# EAGLE board Felderblock6-a-3 (EAGLE 9.6.2)
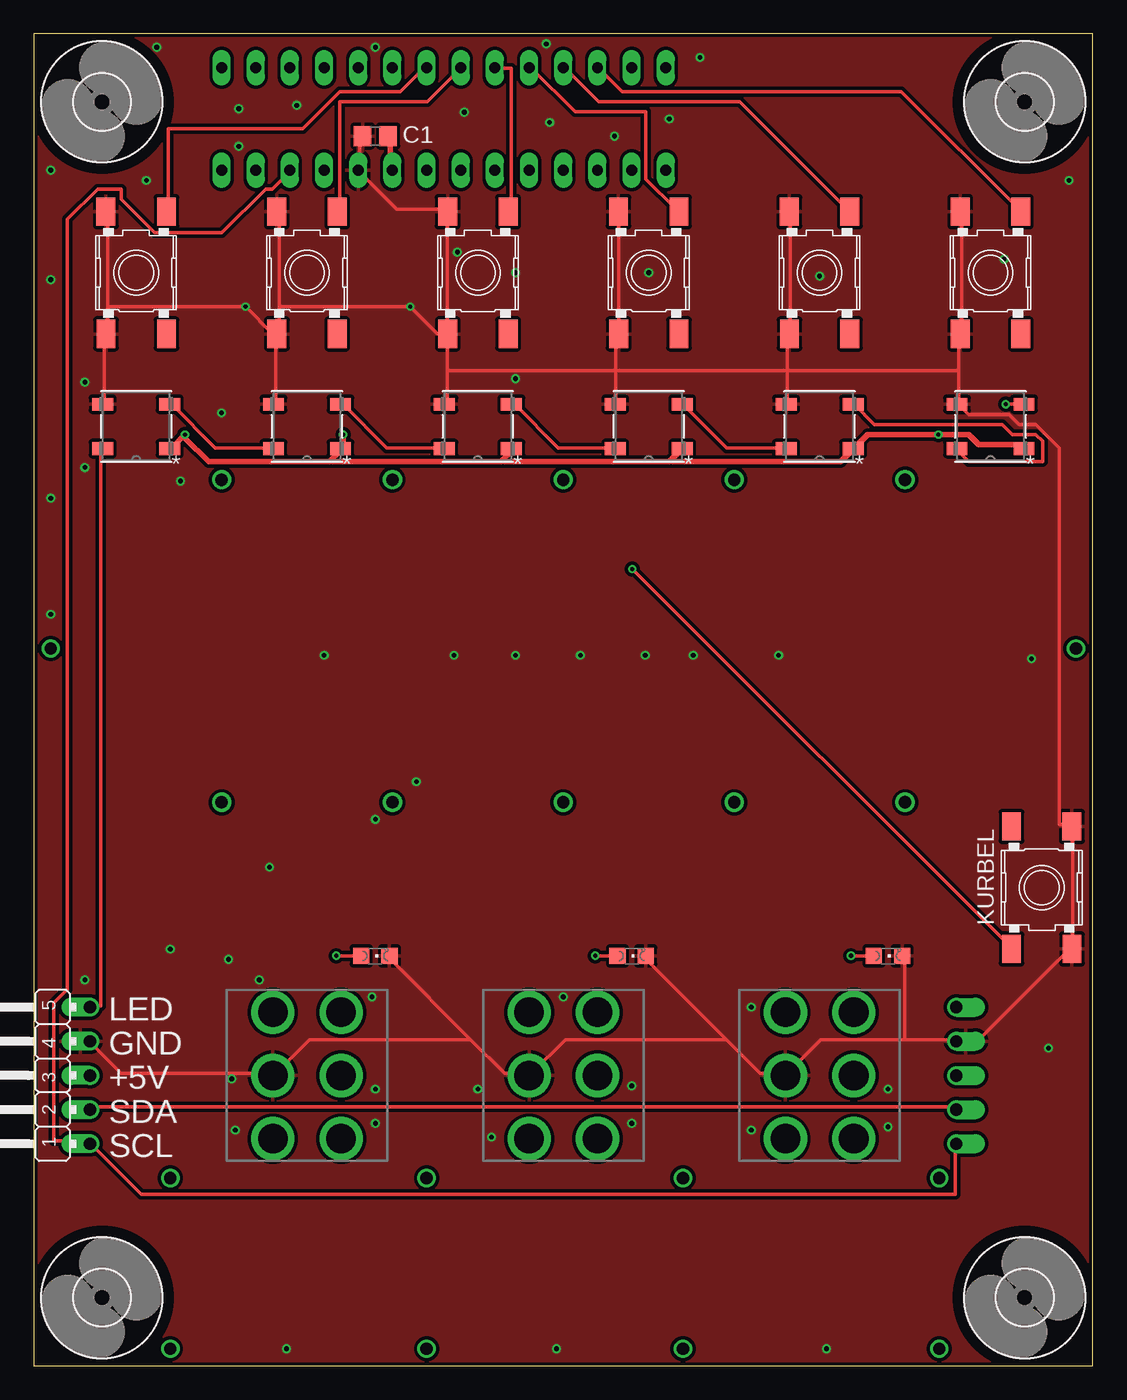
[diagram p0: board, top side]
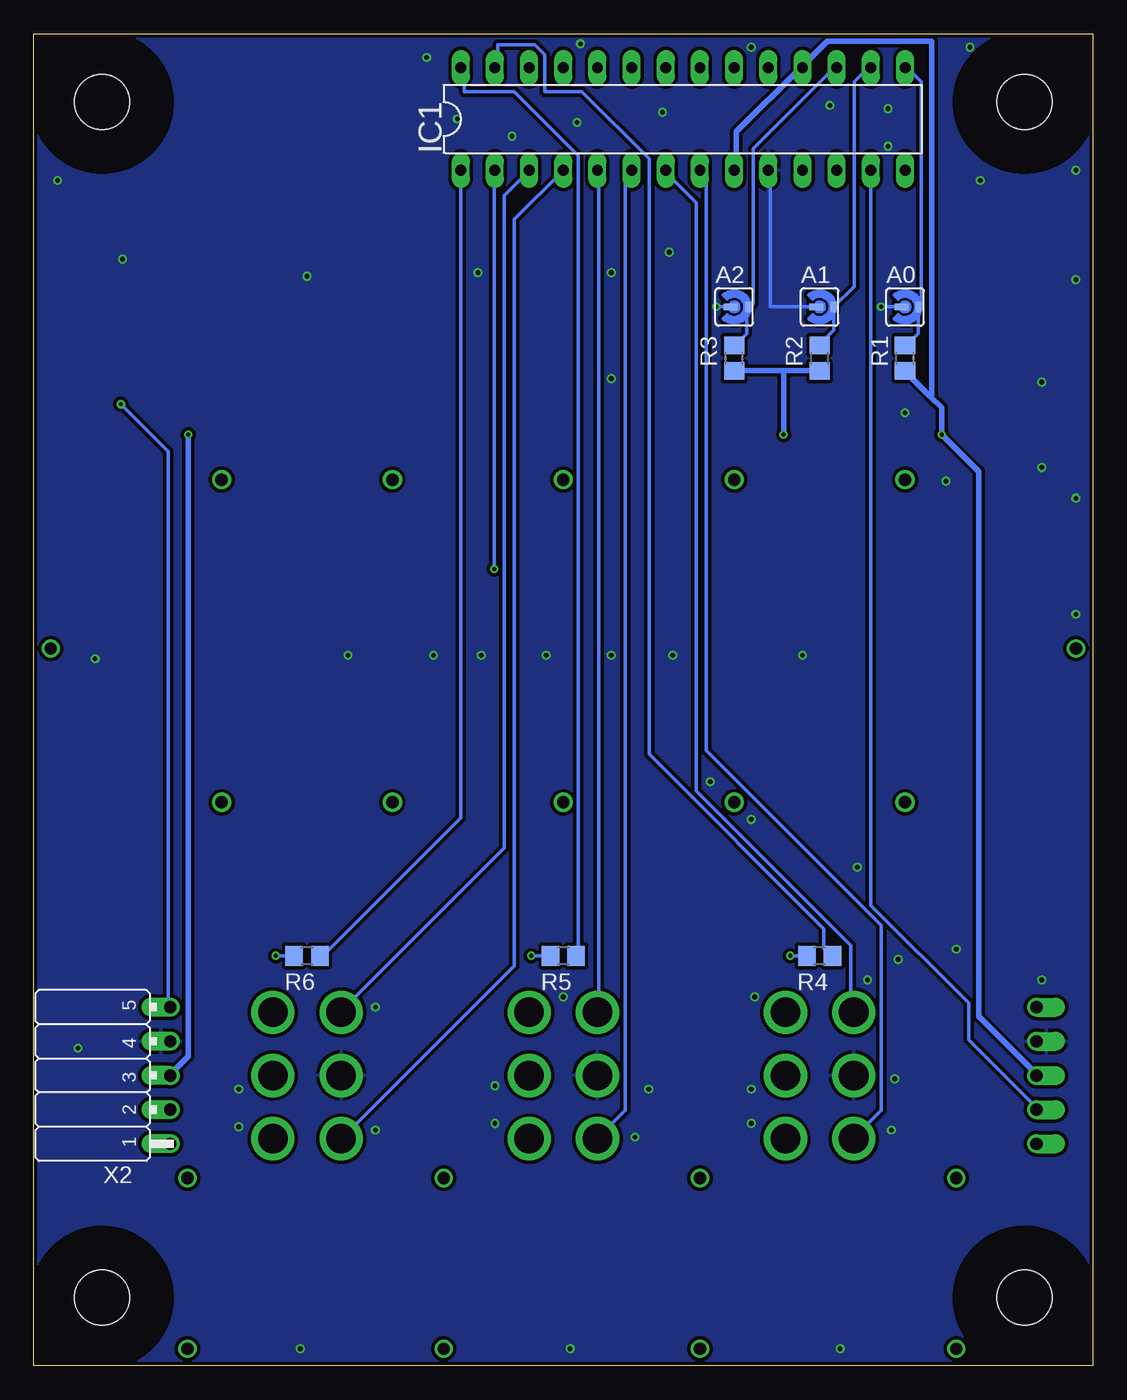
[diagram p1: board, bottom side, seen from below]

Size 78.74 x 99.06 mm. Coordinates in mm from the lower left corner, seen from the top.
Outline: 0,0 78.74,0 78.74,99.06 0,99.06 0,0
Copper layers (1*16): Top 0.035mm / dielectric 1.5mm / Bottom 0.035mm
Design rules "SeeedStudio_2layer_DRU_no_angle_20140221": minimum track width 6mil, minimum drill 12mil, track to track 6mil, track to pad 6mil, pad to pad 6mil, via to via 6mil, smd to smd 0mil, copper to edge 10mil, drill to drill 10mil, minimum pad ring 10mil, minimum via ring 6mil, stop-mask expansion 2mil, vias tented up to drill 100mil, thermal gap 10mil
Net classes: 0 default: width 0.254 mm, clearance 0.254 mm; 1 pwr: width 0.406 mm, clearance 0.254 mm

## Footprints (pad centres in the part's own frame; a part is rotated, then mirrored left to right if it is on the bottom)
SJ_RND2 = smd 1.016 x 0.508: P$1 -0.254,0 | smd 0.406 x 0.813: P$2 1.016,0
C0805 = smd 1.3 x 1.5: 1 -0.95,0; 2 0.95,0
4,1 = hole 4.1: 0,0
DIL28-3 = drill 0.813 long: 1 -16.51,-3.81; 2 -13.97,-3.81; 3 -11.43,-3.81; 4 -8.89,-3.81; 5 -6.35,-3.81; 6 -3.81,-3.81; 7 -1.27,-3.81; 8 1.27,-3.81; 9 3.81,-3.81; 10 6.35,-3.81; 11 8.89,-3.81; 12 11.43,-3.81; 13 13.97,-3.81; 14 16.51,-3.81; 15 16.51,3.81; 16 13.97,3.81; 17 11.43,3.81; 18 8.89,3.81; 19 6.35,3.81; 20 3.81,3.81; 21 1.27,3.81; 22 -1.27,3.81; 23 -3.81,3.81; 24 -6.35,3.81; 25 -8.89,3.81; 26 -11.43,3.81; 27 -13.97,3.81; 28 -16.51,3.81
FELD-BOARD-HOLDER = drill 0.914: 1 0,0; 2 0,23.978
TACTSW-6X6 = smd 2.1 x 1.4: 1 -4.55,2.24; 2 4.55,2.25; 3 -4.55,-2.25; 4 4.55,-2.25
COM-16347_SPK-M = smd 1.549 x 0.94: 1 -2.489,1.65; 2 -2.489,-1.65; 3 2.489,-1.65; 4 2.489,1.65
CHIPLED_0805 = smd 1.2 x 1.2: A 0,-1.05; C 0,1.05
R0805 = smd 1.3 x 1.5: 1 -0.95,0; 2 0.95,0
DP-T1 = drill 2.2 pad 3.2: 1 -4.699,2.54; 2 0,2.54; 3 4.699,2.54; 4 -4.699,-2.54; 5 0,-2.54; 6 4.699,-2.54
JP5F = drill 0.914 offset: 1 -5.08,0; 2 -2.54,0; 3 0,0; 4 2.54,0; 5 5.08,0
JP5F-FEM = drill 0.914 offset: 1 -5.08,0; 2 -2.54,0; 3 0,0; 4 2.54,0; 5 5.08,0

## Placement (x,y rotation side)
A0  [SJ_RND2]  13.97,78.74 0 bottom
A1  [SJ_RND2]  20.32,78.74 0 bottom
A2  [SJ_RND2]  26.67,78.74 0 bottom
C1  [C0805]  25.4,91.44 180 top
H1  MOUNT-HOLE4.1  [4,1]  73.66,5.08 0 top
H2  MOUNT-HOLE4.1  [4,1]  5.08,5.08 0 top
H3  MOUNT-HOLE4.1  [4,1]  73.66,93.98 0 top
H4  MOUNT-HOLE4.1  [4,1]  5.08,93.98 0 top
IC1  MCP23017SP  [DIL28-3]  30.48,92.71 0 bottom
JP1  [FELD-BOARD-HOLDER]  13.97,41.91 0 top
JP2  [FELD-BOARD-HOLDER]  26.67,41.91 0 top
JP3  [FELD-BOARD-HOLDER]  64.77,41.91 0 top
JP4  [FELD-BOARD-HOLDER]  52.07,41.91 0 top
JP5  [FELD-BOARD-HOLDER]  39.37,41.91 0 top
KURBEL  W1  [TACTSW-6X6]  74.93,35.56 270 top
LED1  [COM-16347_SPK-M]  7.62,69.85 180 top
LED2  [COM-16347_SPK-M]  20.32,69.85 180 top
LED3  [COM-16347_SPK-M]  33.02,69.85 180 top
LED4  [COM-16347_SPK-M]  45.72,69.85 180 top
LED5  [COM-16347_SPK-M]  58.42,69.85 180 top
LED6  [COM-16347_SPK-M]  71.12,69.85 180 top
LED7  [CHIPLED_0805]  25.4,30.48 270 top
LED8  [CHIPLED_0805]  44.45,30.48 270 top
LED9  [CHIPLED_0805]  63.5,30.48 270 top
R1  47k  [R0805]  13.97,74.93 90 bottom
R2  47k  [R0805]  20.32,74.93 90 bottom
R3  47k  [R0805]  26.67,74.93 90 bottom
R4  330  [R0805]  20.32,30.48 180 bottom
R5  330  [R0805]  39.37,30.48 180 bottom
R6  330  [R0805]  58.42,30.48 180 bottom
S1  W1  [TACTSW-6X6]  7.62,81.28 90 top
S2  W1  [TACTSW-6X6]  20.32,81.28 90 top
S3  W1  [TACTSW-6X6]  33.02,81.28 90 top
S4  W1  [TACTSW-6X6]  45.72,81.28 90 top
S5  W1  [TACTSW-6X6]  58.42,81.28 90 top
S6  W1  [TACTSW-6X6]  71.12,81.28 90 top
S8  [DP-T1]  20.32,21.59 90 top
S9  [DP-T1]  39.37,21.59 90 top
S10  [DP-T1]  58.42,21.59 90 top
X1  JP5-FLAT  [JP5F]  4.19,21.59 90 top
X2  JP5-FLATFEMALE  [JP5F-FEM]  68.58,21.59 90 bottom

## Library data of the parts
A0 A1 A2 JP1-JP5 S8-S10 X1 X2 = eagleparts
C1 = rcl; SPICEPREFIX: C
H1-H4 = holes
IC1 = microchip; MF: MICROCHIP; MPN: MCP23017-E/SP; OC_FARNELL: 1332088; OC_NEWARK: 31K2959
KURBEL S1-S6 = g-e2e-training
LED1-LED6 = eagleparts; COPYRIGHT: Copyright (C) 2024 Ultra Librarian. All rights reserved.; MANUFACTURER_PART_NUMBER: COM-16347; MFR_NAME: Sparkfun; TYPE: LED Addressable
LED7-LED9 = led
R1-R6 = rcl; SPICEPREFIX: R

## Nets
+5V [pwr]: C1.1 IC1.9 IC1.18 LED1.1 LED2.1 LED3.1 LED4.1 LED5.1 LED6.1 R1.1 R2.1 R3.1 X1.3 X2.3
GND: A0.P$1 A1.P$1 A2.P$1 C1.2 IC1.10 KURBEL.1 KURBEL.2 LED1.3 LED2.3 LED3.3 LED4.3 LED5.3 LED6.3 LED7.C LED8.C LED9.C S1.1 S1.2 S2.1 S2.2 S3.1 S3.2 S4.1 S4.2 S5.1 S5.2 S6.1 S6.2 S8.2 S9.2 S10.2 X1.4 X2.4
I2CSCL: IC1.12 X1.1 X2.1
I2CSDA: IC1.13 X1.2 X2.2
LED_DAT: LED1.4 X1.5
LED_OUT: LED6.2 X2.5
LEDF1: IC1.27 R4.1
LEDF2: IC1.28 R5.1
LEDF3: IC1.1 R6.1
N$1: A0.P$2 IC1.15 R1.2
N$2: A1.P$2 IC1.16 R2.2
N$3: A2.P$2 IC1.17 R3.2
N$4: IC1.21 S1.4
N$5: IC1.22 S2.4
N$6: IC1.23 S3.4
N$7: IC1.24 S4.4
N$8: IC1.25 S5.4
N$9: IC1.26 S6.4
N$10: IC1.8 S8.1
N$11: IC1.7 S8.3
N$12: LED1.2 LED2.4
N$13: LED2.2 LED3.4
N$14: LED3.2 LED4.4
N$15: LED4.2 LED5.4
N$16: LED5.2 LED6.4
N$17: IC1.6 S9.1
N$18: IC1.5 S9.3
N$19: IC1.4 S10.1
N$20: IC1.3 S10.3
N$21: LED8.A R5.2
N$22: LED7.A R4.2
N$23: LED9.A R6.2
N$24: IC1.2 KURBEL.4

## Tracks (layer width: path | path; a pad name or v marks a point on that pad's centre or on a via)
+5V  (via drill 0.3)
  Top 0.406: C1.1 26.5,91.25 26.5,89 IC1.9 | LED1.1 10.25,68.25 v11.25,69.25 11.25,69 13,67.25 22,67.25 22.12,67.38 | 22.12,67.38 22.75,68 LED2.1 23,68.25 v23,69.25 | 34.88,67.38 34.75,67.25 22.25,67.25 22.12,67.38 | 34.88,67.38 35.5,68 LED3.1 | 47.38,67.38 47.25,67.25 35,67.25 34.88,67.38 | 47.38,67.38 48,68 LED4.1 | 47.38,67.38 47.5,67.25 60,67.25 60.75,68 LED5.1 61,68.25 62,69.25 v67.25,69.25 69.5,69.25 70.25,68.5 73.25,68.5 73.5,68.25 LED6.1
  Bottom 0.406: IC1.9 26.5,89 26.5,91.75 21.75,96.5 IC1.18 21.5,96.75 19.75,98.5 12,98.5 12,72.25 12.12,72.12 | 23,74 26.5,74 R3.1 | 23,74 20.5,74 R2.1 | 12.12,72.12 11.25,71.25 v11.25,69.25 8.5,66.5 8.5,26 4.25,21.75 X1.3 | 12.12,72.12 13.75,73.75 R1.1 | v67.25,69.25 67.25,23 68.5,21.75 X2.3 | v23,69.25 23,74
GND  (via drill 0.3, 0.35)
  Top 0.254: LED1.3 5.25,71.5 5.25,76.5 S1.1 5.5,76.75 5.5,78.75 | 5.5,78.75 5.5,85.75 S1.2 | S2.1 18,76.75 17.75,76.75 v15.75,78.75 5.5,78.75 | LED2.3 18,71.5 18,76.5 S2.1 | 18.25,78.75 18.25,76.75 S2.1 | 18.25,78.75 18.25,85.75 S2.2 | 68.75,74 68.75,76.5 S6.1 69,76.75 69,85.75 S6.2 | 68.75,74 68.75,71.5 | 56,74 56,76.5 S5.1 56.25,76.75 56.25,85.75 S5.2 | 56,74 56,71.5 LED5.3 | 43.25,74 43.25,76.5 S4.1 43.5,76.75 43.5,85.75 S4.2 | 43.25,74 43.25,71.5 LED4.3 | C1.2 24.25,91.25 24.25,89 IC1.10 24.25,88.75 27,86 30.75,86 S3.2 30.75,85.75 30.75,76.75 | 30.75,76.75 30,76.75 v28,78.75 18.25,78.75 | 30.75,74 30.75,76.5 S3.1 30.75,76.75 | 30.75,74 30.75,71.5 LED3.3 | 30.75,74 43.25,74 | 43.25,74 56,74 | 56,74 68.75,74 | X1.4 4.25,24 6.5,21.75 17.75,21.75 S8.2 18,21.75 20.5,24.25 32.5,24.25 | 32.5,24.25 35,21.75 36.75,21.75 S9.2 37,21.75 39.5,24.25 51.5,24.25 | 32.5,24.25 26.5,30.25 LED7.C | 51.5,24.25 54,21.75 55.75,21.75 S10.2 56,21.75 58.5,24.25 64.75,24.25 | 51.5,24.25 45.5,30.25 LED8.C | 64.75,24.25 64.75,30.25 LED9.C | 64.75,24.25 68.5,24.25 X2.4 68.75,24.25 70.25,24.25 77,31 KURBEL.2 77.25,31.25 77.25,40 KURBEL.1 77,40.25 76.25,40.25 76.25,68.25 74.5,70 73.25,70 72.5,70.75 69.5,70.75 68.75,71.5 | 68.75,71.5 LED6.3
  Bottom 0.254: v15.75,78.75 14.25,78.75 A0.P$1 | A1.P$1 20.75,78.75 24,78.75 24,88.75 IC1.10 | v28,78.75 27,78.75 A2.P$1
  other vias: 21.59,52.83 31.24,52.83 35.81,52.83 40.64,52.83 45.47,52.83 49.02,52.83 55.37,52.83 74.17,52.58 75.44,23.62 58.93,1.27 38.86,1.27 18.8,1.27 25.4,18.03 25.4,20.57 44.45,20.83 44.45,18.03 63.5,17.78 63.5,20.57 53.34,17.53 53.34,26.67 39.37,27.43 34.04,17.02 33.02,20.57 25.15,27.43 1.27,55.88 1.27,64.52 1.27,80.77 1.27,88.9 9.14,98.04 32,93.22 38.35,92.46 43.18,91.44 47.24,92.71 49.53,97.28 25.4,98.04 38.1,98.3 19.56,93.73 15.24,93.47 15.24,90.68 31.5,82.8 25.4,40.64 16.76,28.7 3.81,28.7 3.81,66.8 3.81,73.15 8.38,88.14 76.96,88.14 72.14,82.3 58.42,81.03 45.72,81.28 35.81,81.28 35.81,73.41 10.16,30.99 10.92,65.79 13.97,70.87 17.53,37.08 28.45,43.43 14.48,30.23 14.73,21.34 14.99,17.53
  pour Top (isolate 0.254): 0.25,98.81 78.49,98.81 78.49,0.25 0.25,0.25
  pour Bottom (isolate 0.254): 0.25,98.81 78.49,98.81 78.49,0.25 0.25,0.25
I2CSCL
  Top 0.254: IC1.12 19,88.75 17.75,87.5 17.25,87.5 14,84.25 9,84.25 6.5,86.75 6.5,87.5 4.75,87.5 2.5,85.25 2.5,28 1.5,27 1.5,16.75 4,16.75 X1.1 4.25,16.5 8,12.75 68.5,12.75 68.5,16.5 X2.1
I2CSDA
  Top 0.254: X2.2 68.5,19.25 4.25,19.25 X1.2
  Bottom 0.254: IC1.13 16.5,88.75 16.5,34.25 9.25,27 9.25,24.25 4.25,19.25 X1.2
LED_DAT
  Top 0.254: LED1.4 5,68 5,26.75 4.25,26.75 X1.5
LED_OUT  (via drill 0.3)
  Top 0.254: v72.25,71.5 LED6.2
  Bottom 0.254: v72.25,71.5 68.75,68 68.75,26.75 X2.5
LEDF1
  Bottom 0.254: R4.1 19.5,30.5 20,31 20,32.5 33,45.5 33,89.75 38,94.75 40.75,94.75 40.75,97.5 41.5,98.25 44.25,98.25 44.25,96.75 IC1.27
LEDF2
  Bottom 0.254: R5.1 38.25,30.5 38.25,90 43,94.75 46.75,94.75 46.75,96.5 IC1.28
LEDF3
  Bottom 0.254: R6.1 57.25,30.5 47,40.75 47,88.75 IC1.1
N$1
  Bottom 0.254: R1.2 13.75,76 13,76.75 13,78.5 A0.P$2 13,78.75 12.75,79 12.75,95.5 13.75,96.5 IC1.15
N$2
  Bottom 0.254: R2.2 20.25,76 19.25,77 19.25,78.5 A1.P$2 19.25,78.75 17.75,80.25 17.75,95.5 16.75,96.5 IC1.16
N$3
  Bottom 0.254: R3.2 26.5,76 25.75,76.75 25.75,78.5 A2.P$2 25.5,78.75 25.25,79 25.25,90.5 19.25,96.5 IC1.17
N$4
  Top 0.254: S1.4 10,86 10,92 20,92 22.75,94.75 27.25,94.75 29,96.5 IC1.21
N$5
  Top 0.254: S2.4 22.75,86 22.75,94 29.25,94 31.75,96.5 IC1.22
N$6
  Top 0.254: S3.4 35.5,86 35.5,96.5 34.5,96.5 IC1.23
N$7
  Top 0.254: S4.4 47.75,86 45.5,88.25 45.5,93.25 40.25,93.25 37,96.5 IC1.24
N$8
  Top 0.254: S5.4 52.5,94 42,94 39.5,96.5 IC1.25
N$9
  Top 0.254: S6.4 73.25,86 64.5,94.75 43.75,94.75 42,96.5 IC1.26
N$10
  Bottom 0.254: IC1.8 29,88.75 28.75,88.5 28.75,45.75 15.75,32.75 15.75,19 17.75,17 S8.1
N$11
  Bottom 0.254: IC1.7 31.75,88.75 29.5,86.5 29.5,42.75 18,31.25 18,26.5 S8.3
N$12
  Top 0.254: LED1.2 10.25,71.5 13.5,68.25 17.75,68.25 LED2.4
N$13
  Top 0.254: LED2.2 23,71.5 26.25,68.25 30.5,68.25 LED3.4
N$14
  Top 0.254: LED3.2 35.75,71.5 39,68.25 43,68.25 LED4.4
N$15
  Top 0.254: LED4.2 48.25,71.5 51.5,68.25 55.75,68.25 LED5.4
N$16
  Top 0.254: LED5.2 61,71.5 62.5,70 72,70 72.75,69.25 74.5,69.25 75,68.75 75,67.25 69.5,67.25 68.75,68 LED6.4
N$17
  Bottom 0.254: IC1.6 34.5,88.75 34.75,88.5 34.75,19 36.75,17 S9.1
N$18
  Bottom 0.254: IC1.5 36.75,88.75 36.75,26.5 S9.3
N$19
  Bottom 0.254: IC1.4 39.5,88.75 43,85.25 43,29.75 55.75,17 S10.1
N$20
  Bottom 0.254: IC1.3 42,88.75 43.75,87 43.75,38.5 55.75,26.5 S10.3
N$21  (via drill 0.3)
  Top 0.254: v41.75,30.5 43.25,30.5 LED8.A
  Bottom 0.254: v41.75,30.5 40.5,30.5 R5.2
N$22  (via drill 0.3)
  Top 0.254: v22.5,30.5 24.25,30.5 LED7.A
  Bottom 0.254: v22.5,30.5 21.5,30.5 R4.2
N$23  (via drill 0.3)
  Top 0.254: v60.75,30.5 62.25,30.5 LED9.A
  Bottom 0.254: v60.75,30.5 59.5,30.5 R6.2
N$24  (via drill 0.3)
  Top 0.254: v44.5,59.25 72.5,31.25 KURBEL.4
  Bottom 0.254: v44.5,59.25 44.5,88.75 IC1.2
N$25  (via drill 0.91)
  other vias: 77.47,53.34
N$26  (via drill 0.91)
  other vias: 1.27,53.34
N$27  (via drill 0.91)
  other vias: 29.21,13.97
N$28  (via drill 0.91)
  other vias: 48.26,13.97
N$29  (via drill 0.91)
  other vias: 67.31,13.97
N$30  (via drill 0.91)
  other vias: 10.16,13.97
N$31  (via drill 0.91)
  other vias: 10.16,1.27
N$32  (via drill 0.91)
  other vias: 29.21,1.27
N$33  (via drill 0.91)
  other vias: 48.26,1.27
N$34  (via drill 0.91)
  other vias: 67.31,1.27

## Text on the board
tNames: LED | GND | +5V | SDA | SCL